# Altium PCB BodgeBoard-DIP8.PcbDoc
Units mm, origin at the board's own origin, x right, y up, seen from the top; angles counter-clockwise.
Board outline 20 x 25 mm, 2 copper layers (Top Layer, Bottom Layer); 3 components, 30 nets, 46 pads, 8 vias.
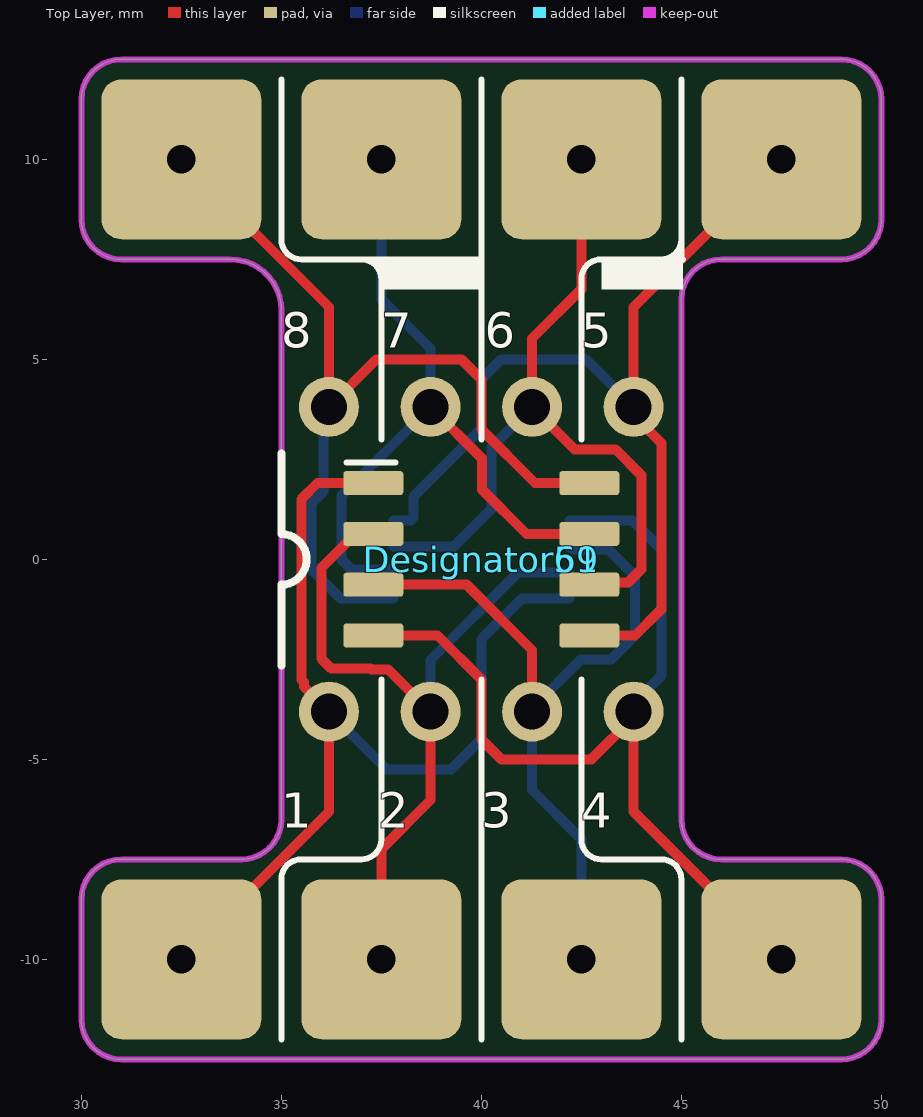
[diagram p0: Top Layer view]
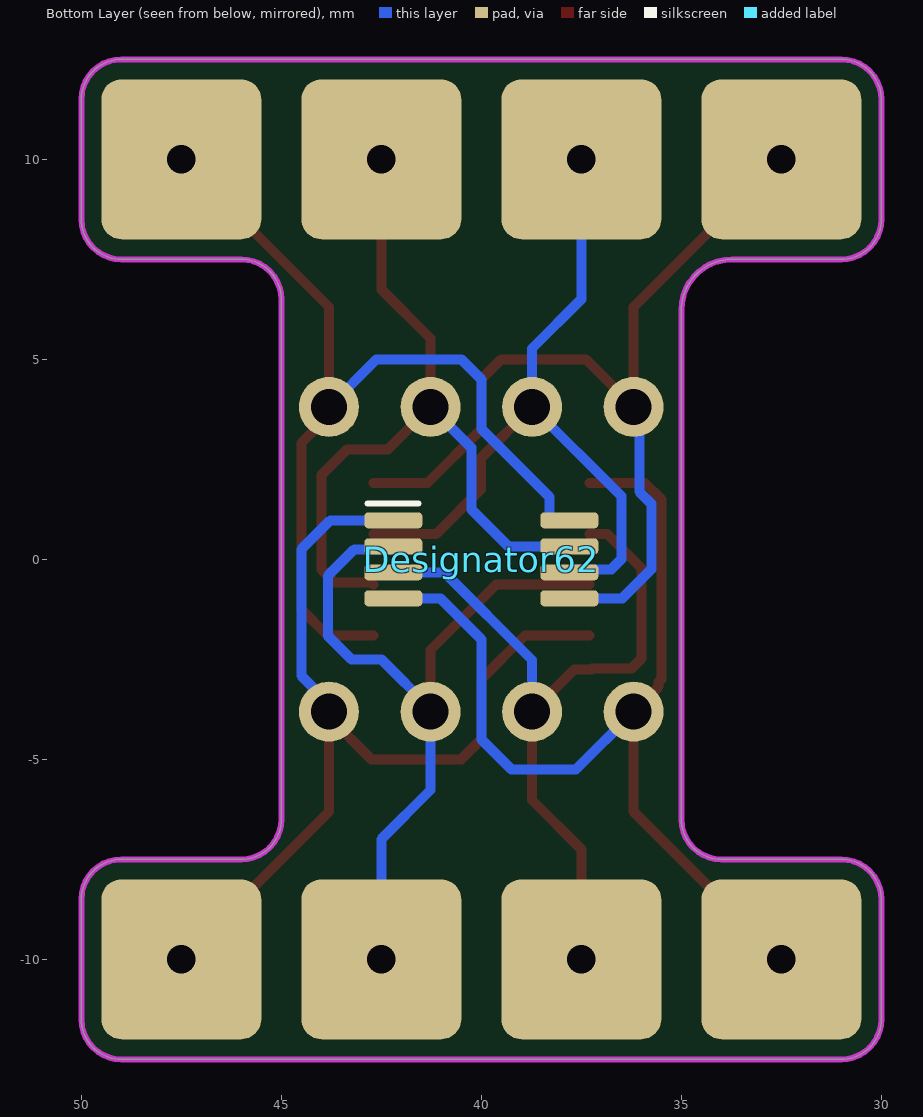
[diagram p1: Bottom Layer view, seen from below]

## Layer stack, top to bottom
Top Solder: solder mask 0.0102, Solder Resist, Dk 3.5
Top Layer: signal copper 0.0356
Dielectric 1: dielectric 0.32, FR-4, Dk 4.8
Bottom Layer: signal copper 0.0356
Bottom Solder: solder mask 0.0102, Solder Resist, Dk 3.5

## Board outline
30,-11.5 ccw(c31,-11.5) 31,-12.5 49,-12.5 ccw(c49,-11.5) 50,-11.5 50,-8.5 ccw(c49,-8.5) 49,-7.5 46,-7.5 cw(c46,-6.5) 45,-6.5 45,6.5 cw(c46,6.5) 46,7.5 49,7.5 ccw(c49,8.5) 50,8.5 50,11.5 ccw(c49,11.5) 49,12.5 31,12.5 ccw(c31,11.5) 30,11.5 30,8.5 ccw(c31,8.5) 31,7.5 33.73,7.5 cw(c33.73,6.23) 35,6.23 35,-6.5 cw(c34,-6.5) 34,-7.5 31,-7.5 ccw(c31,-8.5) 30,-8.5

## Design rules (kind name [scope] priority, off if disabled: settings)
Clearance [All] p1: gap=0.2 ignorepadtopadclearanceinfootprint=FALSE
PolygonConnect [All] p1: connectstyle=Relief reliefconductorwidth=0.254 reliefentries=4 polygonreliefangle="90 Angle" airgapwidth=0.254
RoutingVias [All] p1: holewidth=0.4 width=0.8 viastyle="Through Hole" minholewidth=0.3 minwidth=0.4 maxholewidth=0.7 maxwidth=1
SolderMaskExpansion [All] p1: expansion=0.102 istentingtop=FALSE
Width [All] p1: maxlimit=1 minlimit=0.2 preferedwidth=0.5
30 further rules are at their usual default settings.

## Components (designator, comment, footprint, x,y, rotation, side; value= is the part's Value field where it differs from the comment)
Designator59 "Comment" VISH-DIP8 40,0 r90 top
Designator61 "Comment" SO127P600X500-8 40,0 r0 top
Designator62 "Comment" SO65P490X300-8 40,0 r180 bottom

## Footprints (in the part's own frame and the unit in brackets; to place one, negate y for a bottom-side part, rotate by r counter-clockwise, add the part's x,y. Pads: shape width x height; smd on the part's side, far side on the other; paste and mask are expansions set on the pad)
SO65P490X300-8 [mm] "SO 0.65mm Pitch , 4.9mm Span, 3.00mm Body width, 8 Pins"
  rrect50% 1.45x0.4 smd paste+0 mask+0.05: 1(-2.2,0.975) 2(-2.2,0.325) 3(-2.2,-0.325) 4(-2.2,-0.975) 5(2.2,-0.975) 6(2.2,-0.325) 7(2.2,0.325) 8(2.2,0.975)
  silkscreen extent -2.85,1.4 -1.58,1.4, body extent -2.45,-1.5 2.45,1.5, height 1.1
SO127P600X500-8 [mm] "SO 1.27mm Pitch, 6.00mm Span, 5mm Body Width, 8 Pins"
  rrect25% 1.5x0.6 smd paste+0 mask+0.05: 1(-2.7,1.905) 2(-2.7,0.635) 3(-2.7,-0.635) 4(-2.7,-1.905) 5(2.7,-1.905) 6(2.7,-0.635) 7(2.7,0.635) 8(2.7,1.905)
  silkscreen extent -3.37,2.42 -2.15,2.43, body extent -3,-2.5 3,2.5, height 1.75
VISH-DIP8 [mm] "DIP, 8-Leads, Body 9.9x6.8mm, Pitch 2.54mm"
  round 1.5 hole 0.9: 1(-3.81,3.81) 2(-3.81,1.27) 3(-3.81,-1.27) 4(-3.81,-3.81) 5(3.81,-3.81) 6(3.81,-1.27) 7(3.81,1.27) 8(3.81,3.81)
  silkscreen extent -2.65,4.37 2.65,5, body extent -3.95,-4.95 3.95,4.95, height 4.58

## Free pads (board coordinates)
  rrect25% 4x4 smd far side mask+0.1: 6(32.5,-10) 6(32.5,10) 6(37.5,-10) 6(37.5,10) 6(42.5,-10) 6(42.5,10) 6(47.5,-10) 6(47.5,-10) 6(47.5,10) 6(47.5,10) 7(42.5,-10) 7(42.5,10) 8(37.5,10) 9(32.5,10)
  rrect25% 4x4 smd mask+0.1: 7(37.5,10) 8(32.5,10) 14(32.5,-10) 15(37.5,-10) 16(42.5,-10) 16(42.5,10) 17(47.5,-10) 17(47.5,10)

## Via types
v1: diameter 1.27, hole 0.711, Top Layer to Bottom Layer, 8 vias

## Nets (pads, with @x,y where several pads share a name; then routed paths per layer and width w, separated by ;. In a path a pad name is that pad's centre, name@x,y a point inside that pad or via, vN(x,y) a via of type N, cw(c..) or ccw(c..) an arc to the next point about the centre after c; other vN are vias at no path point)
A: 
B: 
C: 
D: 
E: 
F: 
G: 
H: 
IO1: Designator59.1 Designator61.1 Designator62.4 pad.6@32.5,-10 pad.14 | length 25.1
  Top Layer w0.25: v1(32.5,-10) 36.19,-6.31 Designator59.1 35.565,-3.185 35.565,-3.065 35.5,-3 35.5,1.5 35.905,1.905 Designator61.1
  Bottom Layer w0.25: Designator59.1 37.63,-5.25 39.25,-5.25 40,-4.5 40,-2 41.025,-0.975 Designator62.4
IO2: Designator59.2 Designator61.2 Designator62.3 pad.6@37.5,-10 pad.15 | length 19.6
  Top Layer w0.25: Designator61.2 36.85,0.635 36,-0.215 36,-2.485 36.25,-2.735 37.235,-2.735 37.25,-2.75 37.67,-2.75 Designator59.2 38.73,-6.02 37.5,-7.25 v1(37.5,-10)
  Bottom Layer w0.25: Designator59.2 38.73,-2.52 40.925,-0.325 Designator62.3
IO3: Designator59.3 Designator61.3 Designator62.2 pad.6@42.5,-10 pad.7@42.5,-10 pad.16@42.5,-10 | length 19.7
  Top Layer w0.25: Designator61.3 39.635,-0.635 41.27,-2.27 Designator59.3
  Bottom Layer w0.25: Designator62.2 42.275,0.25 43.176,0.25 43.838,-0.412 43.838,-1.912 43.25,-2.5 42.5,-2.5 41.27,-3.73 Designator59.3 41.27,-5.77 42.5,-7 v1(42.5,-10)
IO4: Designator59.4 Designator61.4 Designator62.1 pad.6@47.5,-10 pad.17@47.5,-10 | length 23.8
  Top Layer w0.25: Designator61.4 38.905,-1.905 40,-3 40,-4.5 40.5,-5 42.75,-5 Designator59.4@43.81,-3.94 ; Designator59.4 Designator59.4@43.81,-3.94 ; v1(47.5,-10) 43.81,-6.31 Designator59.4@43.81,-3.94
  Bottom Layer w0.25: Designator62.1 43.775,0.975 44.5,0.25 44.5,-2.909 43.81,-3.599 Designator59.4
IO5: Designator59.5 Designator61.5 Designator62.8 pad.6@47.5,10 pad.17@47.5,10 | length 24.3
  Top Layer w0.25: Designator61.5 43.845,-1.905 44.5,-1.25 44.5,2.909 43.81,3.599 Designator59.5 43.81,6.31 v1(47.5,10)
  Bottom Layer w0.25: Designator62.8 38.225,0.975 38.3,1.05 38.3,1.563 40,3.262 40,4.5 40.5,5 42.62,5 Designator59.5
IO6: Designator59.6 Designator61.6 Designator62.7 pad.6@42.5,10 pad.7@42.5,10 pad.16@42.5,10 | length 19.8
  Top Layer w0.25: v1(42.5,10) 42.5,6.75 41.27,5.52 Designator59.6 42.33,2.75 43.354,2.75 44,2.104 44,-0.25 43.676,-0.574 42.761,-0.574 Designator61.6
  Bottom Layer w0.25: Designator62.7 39.325,0.325 40.25,1.25 40.25,2.79 Designator59.6
IO7: Designator59.7 Designator61.7 Designator62.6 pad.6@37.5,10 pad.7@37.5,10 pad.8@37.5,10 | length 18.6
  Top Layer w0.25: Designator59.7 40.013,2.528 40.013,1.75 41.127,0.635 Designator61.7
  Bottom Layer w0.25: v1(37.5,10) 37.5,6.5 38.73,5.27 Designator59.7 36.5,1.58 36.5,0 36.75,-0.25 37.725,-0.25 Designator62.6
IO8: Designator59.8 Designator61.8 Designator62.5 pad.6@32.5,10 pad.8@32.5,10 pad.9 | length 23.3
  Top Layer w0.25: v1(32.5,10) 36.19,6.31 Designator59.8 37.38,5 39.5,5 40,4.5 40,3.25 41.345,1.905 Designator61.8
  Bottom Layer w0.25: Designator59.8 36.05,3.67 36.05,1.691 35.75,1.391 35.75,-0.25 36.475,-0.975 Designator62.5
IO9: 
IO10: 
IO11: 
IO12: 
IO13: 
IO14: 
UA1: 
UA2: 
UA3: 
UA4: 
UA5: 
UA6: 
UA7: 
UA8: 

## Keep-outs
Keep-Out Layer:
  lines w0.15: 30,-11.5 ccw(c31,-11.5) 31,-12.5 49,-12.5 ccw(c49,-11.5) 50,-11.5 50,-8.5 ccw(c49,-8.5) 49,-7.5 46,-7.5 cw(c46,-6.5) 45,-6.5 45,6.5 cw(c46,6.5) 46,7.5 49,7.5 ccw(c49,8.5) 50,8.5 50,11.5 ccw(c49,11.5) 49,12.5 40,12.5 31,12.5 ccw(c31,11.5) 30,11.5 30,8.5 ccw(c31,8.5) 31,7.5 33.73,7.5 cw(c33.73,6.23) 35,6.23 35,-6.5 cw(c34,-6.5) 34,-7.5 31,-7.5 ccw(c31,-8.5) 30,-8.5 30,-11.5

## Silkscreen, mask and mechanical layers (free items; w line width, h text height)
Top Overlay:
  region: 45.04,7.5 43,7.5 43,6.75 45.04,6.75
  rectangle: 37.5,6.75 40,7.5
  lines w0.15: 35,-12 35,-8 cw(c35.5,-8) 35.5,-7.5 37,-7.5 ccw(c37,-7) 37.5,-7 37.5,-3 ; 35,12 35,8 ccw(c35.5,8) 35.5,7.5 37,7.5 ; 37.5,3 37.5,7 ccw(c37,7) 37,7.5 ; 37.5,7.25 ccw(c37.25,7.25) 37.25,7.5 ; 40,-12 40,-8 40,-3 ; 40,3 40,8 40,12 ; 40,7.5 37,7.5 ; 42.5,-3 42.5,-7 ccw(c43,-7) 43,-7.5 44.5,-7.5 cw(c44.5,-8) 45,-8 45,-12 ; 42.5,3 42.5,7 cw(c43,7) 43,7.5 ; 44.5,7 45.04,7.5 43,7.5 ; 45,7.75 44.25,7 45,7.5 45,8 ; 45,12 45,8 ; 37.25,7.5 37.25,7.5 ; 43,7.5 44.5,7.5 ccw(c44.5,8) 45,8
  text "8" at 35,5 h1.5
  text "7" at 37.5,5 h1.5
  text "6" at 40.08,5 h1.5
  text "5" at 42.5,5 h1.5
  text "1" at 35,-7 h1.5
  text "2" at 37.42,-7 h1.5
  text "3" at 40,-7 h1.5
  text "4" at 42.5,-7 h1.5
Mechanical 13:
  circle w0.1: c-4.05,-2.5 r0.5
  lines w0.1: -4.95,-3.4 4.95,-3.4 4.95,3.4 -4.95,3.4 -4.95,-3.4

## Text inside footprints (layer, text, board x,y; h text height)
Designator61: Top Assembly "1" at 36.55,1.6 h0.4
Designator62: Bottom Assembly "1" at 42.925,0.775 h0.4